# Altium PCB PCB1.PcbDoc
Units mil, origin at the board's own origin, x right, y up, seen from the top; angles counter-clockwise.
Board outline 4532.36 x 3130 mil, 2 copper layers (L1, L2), stack 62.756 mil thick; 46 components, 43 nets, 198 pads, 160 vias.
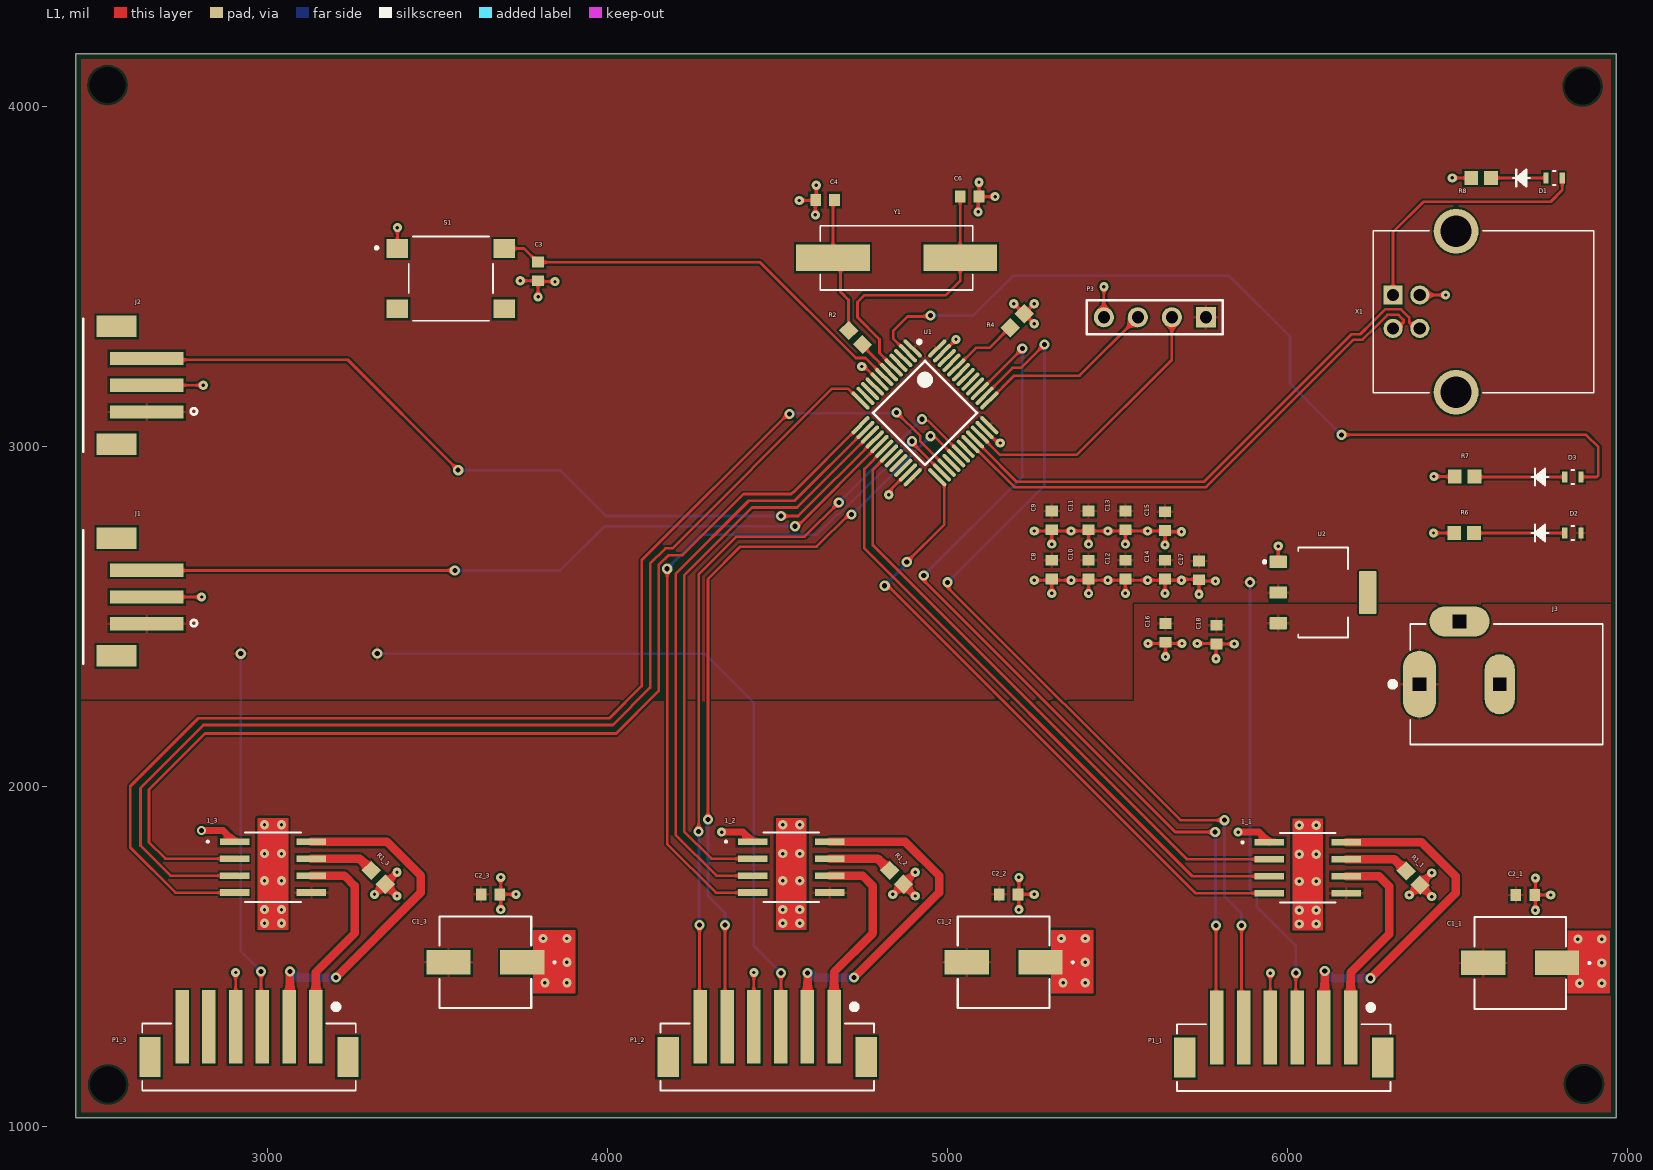
[diagram p0: L1 view]
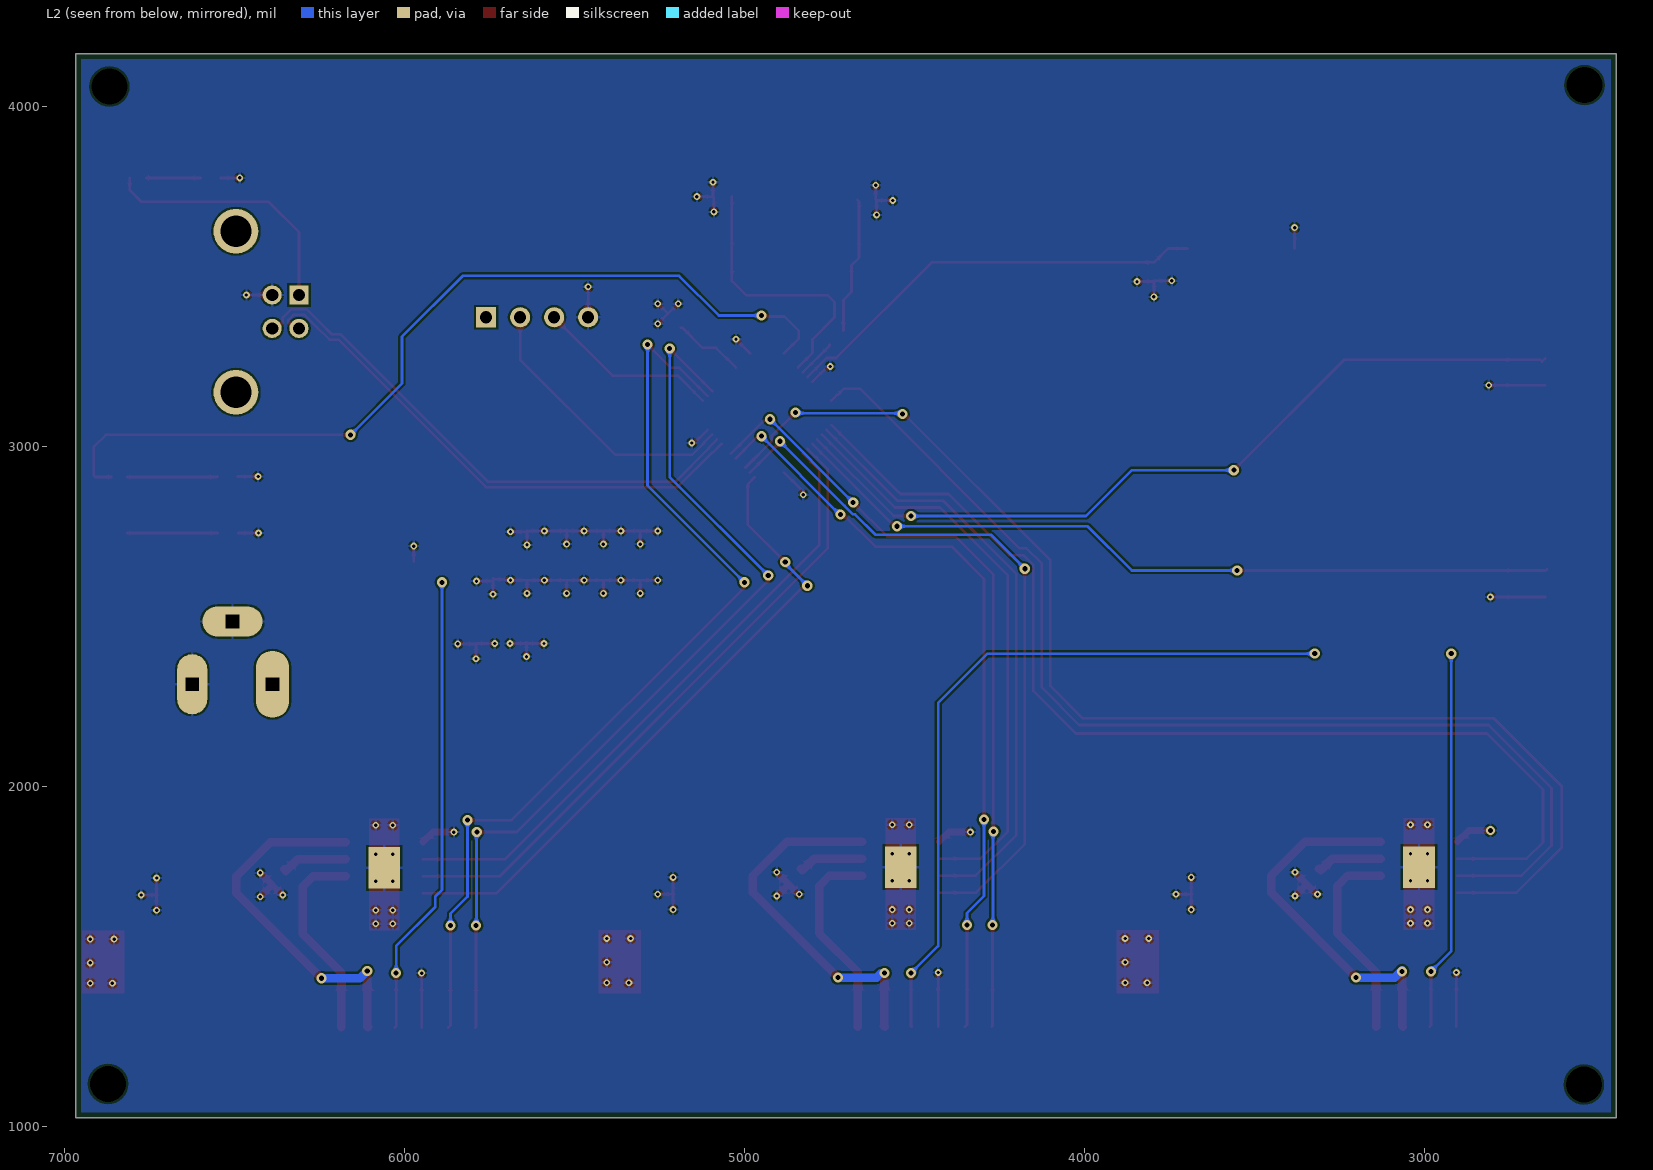
[diagram p1: L2 view, seen from below]

## Layer stack, top to bottom
Top Solder: solder mask 0.1, Solder Resist, Dk 1
L1: signal copper 1.3779
Core: dielectric 60, FR-4, Dk 4.6
L2: signal copper 1.3779
Bottom Solder: solder mask 0.1, Solder Resist, Dk 1

## Board outline
2435,1025 2435,4155 6967.36,4155 6967.36,1025

## Design rules (kind name [scope] priority, off if disabled: settings)
BoardOutlineClearance [All] p1: gap=15 ignorepadtopadclearanceinfootprint=FALSE
Clearance [All] p1: gap=6 ignorepadtopadclearanceinfootprint=FALSE except(0: Arc-Hole Track-Hole SMDPad-Hole THPad-Hole Via-Hole Fill-Hole Poly-Hole Region-Hole Text-Hole)
ComponentClearance [All] p1: gap=1 collisioncheckmode=3 verticalgap=1 showdistances=FALSE
DiffPairsRouting [All] p1: maxlimit=393.7 minlimit=6 mostfreqgap=8 toplayer_minwidth=6 toplayer_maxwidth=15 toplayer_prefwidth=8 bottomlayer_minwidth=6 bottomlayer_maxwidth=15 bottomlayer_prefwidth=8 maxuncoupledlength=500
HoleSize [All] p1: absolutevalues=TRUE maxlimit=265 minlimit=10 maxpercent=80.000 minpercent=20.000
HoleToHoleClearance [All] p1: gap=10 allowstackedmicrovias=FALSE
MinimumAnnularRing [All] p1: minimumring=5
MinimumSolderMaskSliver [All] p1: minsoldermaskwidth=0
PlaneClearance [All] p1: clearance=10
PlaneConnect [All] p1: planeconnectstyle=Direct reliefexpansion=16 reliefentries=4 reliefconductorwidth=6 reliefairgap=6
PolygonConnect [All] p1: connectstyle=Relief reliefconductorwidth=8 reliefentries=4 polygonreliefangle="90 Angle" airgapwidth=6
RoutingCorners [All] p1: cornerstyle=45-Degree minsetback=49.21 maxsetback=49.21
RoutingVias [All] p1: holewidth=15 width=30 viastyle="Through Hole" minholewidth=10 minwidth=27 maxholewidth=100 maxwidth=114
SilkToSilkClearance [All] p1: silktosilkclearance=0
SilkToSolderMaskClearance [IsPad] p1: minsilkscreentomaskgap=6 clearancetoexposedcopper=TRUE
SolderMaskExpansion [All] p1: expansion=2.95
SupplyNets [All] p1: voltage=3,000
Width [All] p1: maxlimit=400 minlimit=6 preferedwidth=8
20 further rules are at their usual default settings.

## Classes and differential pairs
channel class H-Bridge: MotorX MotorY MotorZ
component class MotorZ: 1_3 C1_3 C2_3 P1_3 R1_3 "R1_Motor - Z"
component class MotorY: 1_2 C1_2 C2_2 P1_2 R1_2 "R1_Motor - Y"
component class PCB_TopSchematic: C3 C4 C6 C8 C9 C10 C11 C12 C13 C14 C15 C16 C17 C18 D1 D2 D3 J1 J2 J3 P3 R2 R4 R6 R7 R8 S1 U1 U2 X1 Y1
component class MotorX: 1_1 C1_1 C2_1 P1_1 R1_1

## Components (designator, comment, footprint, x,y, rotation, side; value= is the part's Value field where it differs from the comment)
1_1 "DRV8872DDAR" DDA0008H_N 6060,1760 r0 top (schematic designator 1)
1_2 "DRV8872DDAR" DDA0008H_N 4540,1761.81 r0 top (schematic designator 1)
1_3 "DRV8872DDAR" DDA0008H_N 3015,1761.81 r0 top (schematic designator 1)
C1_1 "47uF" CAP_UWF_6P3X5P00 6685,1480 r180 top (schematic designator C1)
C1_2 "47uF" CAP_UWF_6P3X5P00 5165,1481.81 r180 top (schematic designator C1)
C1_3 "47uF" CAP_UWF_6P3X5P00 3640,1481.81 r180 top (schematic designator C1)
C2_1 "Cap Semi" 1608[0603] 6700,1680 r180 top value=0.1uF (schematic designator C2)
C2_2 "Cap Semi" 1608[0603] 5180,1681.81 r180 top value=0.1uF (schematic designator C2)
C2_3 "Cap Semi" 1608[0603] 3655,1681.81 r180 top value=0.1uF (schematic designator C2)
C3 "Cap Semi" 1608[0603] 3795,3515 r90 top value=100nF (schematic designator C4)
C4 "Cap Semi" 1608[0603] 4640,3725 r180 top value=20pF (schematic designator C12)
C6 "Cap Semi" 1608[0603] 5065,3735 r0 top value=20pF (schematic designator C3)
C8 "Cap Semi" 1608[0603] 5306.67,2637.44 r90 top value=100nF
C9 "Cap Semi" 1608[0603] 5306.67,2782.44 r90 top value=100nF (schematic designator C5)
C10 "Cap Semi" 1608[0603] 5415,2637.44 r90 top value=10uF (schematic designator C9)
C11 "Cap Semi" 1608[0603] 5415,2782.44 r90 top value=100nF (schematic designator C6)
C12 "Cap Semi" 1608[0603] 5523.33,2637.44 r90 top value=100nF (schematic designator C10)
C13 "Cap Semi" 1608[0603] 5523.33,2782.44 r90 top value=100nF (schematic designator C7)
C14 "Cap Semi" 1608[0603] 5640,2637.44 r90 top value=1uF (schematic designator C11)
C15 "Cap Semi" 1608[0603] 5640,2780 r90 top value=22uF (schematic designator C16)
C16 "Cap Semi" 1608[0603] 5641.42,2451.34 r90 top value=47uF (schematic designator C13)
C17 "Cap Semi" 1608[0603] 5740,2635 r90 top value=47uF (schematic designator C15)
C18 "Cap Semi" 1608[0603] 5791.42,2446.34 r90 top value=10uF (schematic designator C14)
D1 "SML-E12M8WT86" LED_SMLD12_ROM 6785,3790 r0 top (schematic designator D2)
D2 "SML-E12M8WT86" LED_SMLD12_ROM 6840,2745 r0 top (schematic designator D1)
D3 "SML-E12M8WT86" LED_SMLD12_ROM 6840,2910 r0 top
J1 "B3B-PH-SM4-TB(LF)(SN)" JST_B3B-PH-SM4-TB(LF)(SN) 2555,2556.77 r90 top (schematic designator J4)
J2 "B3B-PH-SM4-TB(LF)(SN)" JST_B3B-PH-SM4-TB(LF)(SN) 2555,3180 r90 top locked (schematic designator J3)
J3 "PJ-002A" CUI_PJ-002A 6388.78,2300 r0 top (schematic designator J1)
P1_1 "B6B-PH-SM4-TB(LF)(SN)" JST_B6B-PH-SM4-TB(LF)(SN) 5989.37,1290 r180 top (schematic designator P1)
P1_2 "B6B-PH-SM4-TB(LF)(SN)" JST_B6B-PH-SM4-TB(LF)(SN) 4469.37,1291.81 r180 top (schematic designator P1)
P1_3 "B6B-PH-SM4-TB(LF)(SN)" JST_B6B-PH-SM4-TB(LF)(SN) 2944.37,1291.81 r180 top (schematic designator P1)
P3 "Header 4" HDR1X4 5760,3380 r180 top (schematic designator P1)
R1_1 "0.2" RESC1607X60N 6370,1730 r315 top (schematic designator R1)
R1_2 "0.2" RESC1607X60N 4850,1731.81 r315 top (schematic designator R1)
R1_3 "0.2" RESC1607X60N 3325,1731.81 r315 top (schematic designator R1)
R2 "Res3" RESC1607X60N 4729.54,3320.46 r315 top value=360
R4 "Res3" RESC1607X60N 5205,3370 r45 top value=10K (schematic designator R6)
R6 "Res3" RESC1607X60N 6520,2745 r0 top value=1K (schematic designator R3)
R7 "Res3" RESC1607X60N 6521.42,2911.34 r0 top value=1K (schematic designator R5)
R8 "Res3" RESC1607X60N 6570,3790 r0 top value=1K (schematic designator R4)
S1 "SW-PB" SW_B3FS-1010P 3538.58,3493.66 r0 top
U1 "STM32F103C8T6" STM-LQFP48_N 4933.58,3098.66 r315 top
U2 "AMS1117-3.3" SOT229P700X180-4N 6105,2570 r270 top
X1 "USB-B1HSB6" OST_USB-B1HSB6 6496.42,3396.34 r90 top
Y1 "8MHz" XTAL_ECS-80-20-5PX-TR 4850,3555 r180 top

## Footprints (in the part's own frame and the unit in brackets; to place one, negate y for a bottom-side part, rotate by r counter-clockwise, add the part's x,y. Pads: shape width x height; smd on the part's side, far side on the other; paste and mask are expansions set on the pad)
1608[0603] [mm] "Chip Capacitor, Body 1.6x0.8mm, IPC High Density"
  rect 0.8x0.9 smd: 1(-0.7,0) 2(0.7,0)
  body extent -0.87,-0.48 0.87,0.48, height 1.3
CAP_UWF_6P3X5P00 [mil]
  rect 130x72 smd paste+0 mask+0: 1(-108.5,0) 2(108.5,0)
  silkscreen extent -206,-135 135,135, body extent 0,0 10,10, height 10
CUI_PJ-002A [mm]
  oval 2.5x5 hole 1 square: 1(0,0)
  oval 2.25x4.5 hole 1 square: 2(6,0)
  oval 4.5x2.25 hole 1 square: 3(3,4.7)
  silkscreen extent -2.2,-4.5 13.7,4.5
DDA0008H_N [mil]
  rect 87x20 smd: 1(-113.19,75) 2(-113.19,25) 3(-113.19,-25) 4(-113.19,-75) 5(113.19,-75) 6(113.19,-25) 7(113.19,25) 8(113.19,75)
  rect 94x122 smd far side paste-118.11: 9(0,0)
  silkscreen extent -195,-102 82,102
HDR1X4 [mm] "Connector; Header; 4 Position"
  rect 1.5x1.5 hole 0.9: 1(0,0)
  round 1.5 hole 0.9: 2(2.54,0) 3(5.08,0) 4(7.62,0)
  silkscreen extent -1.27,-1.27 8.89,1.27
JST_B3B-PH-SM4-TB(LF)(SN) [mm]
  rect 1x5.5 smd: 1(-2,-2.25) 2(0,-2.25) 3(2,-2.25)
  rect 1.6x3 smd: 4(4.4,0) 5(-4.4,0)
  silkscreen extent -4.97,-6.01 4.97,2.5
JST_B6B-PH-SM4-TB(LF)(SN) [mm]
  rect 1x5.5 smd: 1(-5,0) 2(-3,0) 3(-1,0) 4(1,0) 5(3,0) 6(5,0)
  rect 1.6x3 smd: P1(-7.4,2.25) P2(7.4,2.25)
  silkscreen extent -7.98,-1.7 7.98,4.75
LED_SMLD12_ROM [mil]
  rect 15.5x32 smd: 1(-23.75,0) 2(23.75,0)
  silkscreen extent -122,-25 4,25, body extent 0,0 10,10, height 10
OST_USB-B1HSB6 [mm]
  rect 1.428x1.428 hole 0.92: 1(1.25,4.71)
  round 1.428 hole 0.92: 2(-1.25,4.71) 3(-1.25,2.71) 4(1.25,2.71)
  round 3.346 hole 2.33: P1(-6.02,0) P2(6.02,0)
  silkscreen extent -6.05,-10.3 6.05,6.2
RESC1607X60N [mm]
  rect 1.04x1.02 smd: 1(-0.735,0) 2(0.735,0)
SOT229P700X180-4N [mm]
  rrect15% 0.93x1.31 smd: 1(-2.29,-3.345) 2(0,-3.345) 3(2.29,-3.345)
  rrect15% 3.24x1.31 smd: 4(0,3.345)
  silkscreen extent -3.36,-4.47 3.36,1.86
STM-LQFP48_N [mm] "QFP, 48-Leads, Body 7x7mm, Pitch 0.5mm, IPC Medium Density"
  oval 1.8x0.3 smd: 1(-4.05,2.75) 2(-4.05,2.25) 3(-4.05,1.75) 4(-4.05,1.25) 5(-4.05,0.75) 6(-4.05,0.25) 7(-4.05,-0.25) 8(-4.05,-0.75) 9(-4.05,-1.25) 10(-4.05,-1.75) 11(-4.05,-2.25) 12(-4.05,-2.75) 25(4.05,-2.75) 26(4.05,-2.25) 27(4.05,-1.75) 28(4.05,-1.25) 29(4.05,-0.75) 30(4.05,-0.25) 31(4.05,0.25) 32(4.05,0.75) 33(4.05,1.25) 34(4.05,1.75) 35(4.05,2.25) 36(4.05,2.75)
  oval 0.3x1.8 smd: 13(-2.75,-4.05) 14(-2.25,-4.05) 15(-1.75,-4.05) 16(-1.25,-4.05) 17(-0.75,-4.05) 18(-0.25,-4.05) 19(0.25,-4.05) 20(0.75,-4.05) 21(1.25,-4.05) 22(1.75,-4.05) 23(2.25,-4.05) 24(2.75,-4.05) 37(2.75,4.05) 38(2.25,4.05) 39(1.75,4.05) 40(1.25,4.05) 41(0.75,4.05) 42(0.25,4.05) 43(-0.25,4.05) 44(-0.75,4.05) 45(-1.25,4.05) 46(-1.75,4.05) 47(-2.25,4.05) 48(-2.75,4.05)
  silkscreen extent -4.17,-2.75 2.75,3.57, body extent -3.5,-3.5 3.5,3.5, height 1.6
SW_B3FS-1010P [mm]
  rect 1.6x1.4 smd: 1(-4,2.25) 2(4,2.25) 3(-4,-2.25) 4(4,-2.25)
  silkscreen extent -5.65,-3.15 3.15,3.15
XTAL_ECS-80-20-5PX-TR [mm]
  rect 5.5x2 smd: 1(-4.75,0) 2(4.75,0)
  silkscreen extent -5.7,-2.4 5.7,2.4

## Part data
1_1 1_2 1_3: "Unipolar Motor Driver NMOS PWM 8-SO PowerPad", Package="SO-8 Texas Instruments", Availability=Unavailable, MF="Texas Instruments", MP=DRV8872DDAR, Price=None, SnapEDA_Link=https://www.snapeda.com/parts/DRV8872DDAR/Texas%20Instruments/view-part/561864/?ref=snap
C1_1 C1_2 C1_3: library part UWR1E470MCL1GB, "No Description Available", Built_By=EMA_Cory, Copyright="Copyright (C) 2018 Accelerated Designs. All rights reserved", Manufacturer_Part_Number=UWR1E470MCL1GB, RefDes=RefDes, SourceLibrary=Nichicon_2019-09-13, Type=DEV, Vendor=Nichicon
C2_1 C2_2 C2_3 C3 C4 C6 C8 C9 C10 C11 C12 C13 C14 C15 C16 C17 C18: "Capacitor (Semiconductor SIM Model)", LatestRevisionDate=29-May-2009, LatestRevisionNote="IPC-7351 Footprint Added.", PackageDescription="Chip Capacitor", PackageReference=C1206, Published=8-Jun-2000, Publisher="Altium Limited"
D1 D2 D3: "No Description Available", Built_By=EMA_Matt, Copyright="Copyright (C) 2018 Accelerated Designs. All rights reserved", Manufacturer_Part_Number=SML-E12M8WT86, RefDes=RefDes, SourceLibrary=Rohm_2019-09-23, Type=DEV, Vendor="ROHM Semiconductor"
J1 J2: "Connector Header Surface Mount 3 position 0.079 _2.00mm_", Package="2010 JST", Digi-Key_Part_Number=455-1735-1-ND, Digi-Key_Purchase_URL=https://www.digikey.com/product-detail/en/jst-sales-america-inc/B3B-PH-SM4-TB_LF__SN_/455-1735-1-ND/926832?utm_source=snapeda&utm_medium=aggregator&utm_campaign=symbol, MF="JST Sales", MP=B3B-PH-SM4-TB_LF__SN_, SnapEDA_Link=https://www.snapeda.com/parts/B3B-PH-SM4-TB%28LF%29%28SN%29/JST%20Sales%20America%20Inc./view-part/53135/?ref=snap
J3: "2,0 x 6,5 mm, 2,5 A, Yatay, Açık Delik, Dc Güç Jakı Konnektörü", Package=None, Availability=Unavailable, CUI_purchase_URL=https://www.cuidevices.com/product/interconnect/connectors/dc-power-connectors/jacks/pj-002a?utm_source=snapeda.com&utm_medium=referral&utm_campaign=snapedaBOM, MF="CUI Devices", MP=PJ-002A, Price=None, SnapEDA_Link=https://www.snapeda.com/parts/PJ-002A/CUI%20Devices/view-part/287588/?ref=snap
P1_1 P1_2 P1_3: "Connector Header Surface Mount 6 position 0.079 _2.00mm_", Package=None, Availability=Unavailable, MF="JST Sales", MP=B6B-PH-SM4-TB_LF__SN_, Price=None, SnapEDA_Link=https://www.snapeda.com/parts/B6B-PH-SM4-TB%28LF%29%28SN%29/JST%20Sales%20America%20Inc./view-part/52131/?ref=snap
P3: "Header, 4-Pin", LatestRevisionDate=17-Jul-2002, LatestRevisionNote="Re-released for DXP Platform.", Publisher="Altium Limited"
R1_1 R1_2 R1_3: library part RC0603JR-071KL, "1 kOhms ±5% 0.1W, 1/10W Chip Resistor 0603 _1608 Metric_ Moisture Resistant Thick Film", Package="0603 Yageo", Digi-Key_Part_Number=311-1.0KGRCT-ND, Digi-Key_Purchase_URL=https://www.digikey.co.nz/product-detail/en/yageo/RC0603JR-071KL/311-1.0KGRCT-ND/729624?utm_source=snapeda&utm_medium=aggregator&utm_campaign=symbol, MF=Yageo, MP=RC0603JR-071KL, SnapEDA_Link=https://www.snapeda.com/parts/RC0603JR-071KL/Yageo/view-part/106141/?ref=snap
R2 R4 R6 R7 R8: "Resistor", LatestRevisionDate=29-May-2009, LatestRevisionNote="IPC-7351 Footprint Added.", PackageDescription="Chip Resistor", PackageReference=J1-0603, Published=8-Jun-2000, Publisher="Altium Limited"
S1: "Switch", LatestRevisionDate=17-Jul-2002, LatestRevisionNote="Re-released for DXP Platform.", PackageDescription="Switch; 2 Leads", PackageReference=SPST-2, Published=24-Mar-1999, Publisher="Altium Limited"
U1: "ARM Cortex-M3 32-bit MCU, 64 KB Flash, 20 KB Internal RAM, 37 I/Os, 48-pin LQFP, -40 to 85 degC, Tray", I/Os (High Current)=37, Operating Frequency(F) (Processor speed) (MHz)=72, Supplier Part Number 1=497-6063-ND, Supply Voltage(Vcc) min (V)=2, A/D Converter="2x12-bit (10 Channel)", ComponentLink1Description="Manufacturer URL", ComponentLink1URL=http://www.st.com/web/en/home.html, ComponentLink2Description=Datasheet, ComponentLink2URL=http://www.st.com/st-web-ui/static/active/en/resource/technical/document/datasheet/CD00161566.pdf, ComponentLink3Description="Package Specification", ComponentLink3URL=http://www.st.com/st-web-ui/static/active/en/resource/technical/document/datasheet/DM00058181.pdf, Core="ARM Cortex-M3", DatasheetVersion="Rev. 16", FLASH Size (Prog) (kB)=64, Internal RAM Size (kB)=20, Mounting Technology="Surface Mount", PackageDescription="48-Pin Low Profile Quad Flat Package, 7 x 7 mm Body, 0.5 mm Pitch", PackageReference=LQFP48, PackageVersion="Rev. 6, 06/2013", Packing=Tray, PartNumber=STM32F103C8T6, Supplier 1=Digi-Key, Supplier 2=Farnell, Supplier 3=Newark, Supplier 4=Newark, Supplier 5=Mouser, Supplier Part Number 2=1447637, Supplier Part Number 3=59M2182, Supplier Part Number 4=57P1222, Supplier Part Number 5=511-STM32F103C8T6
U2: "Sot223/Pkg 1-Amp 3.3-Volt Low Drop Out Voltage Regulatator", Package=None, Availability=Unavailable, MF="Advanced Monolithic Systems", MP=AMS1117-3.3, Price=None, SnapEDA_Link=https://www.snapeda.com/parts/AMS1117-3.3/Advanced%20Monolithic%20Systems/view-part/53450/?ref=snap
X1: "USB-B _USB TYPE-B_ Receptacle Connector 4 Position Through Hole, Right Angle", Package=None, Digi-Key_Part_Number=ED2983-ND, Digi-Key_Purchase_URL=https://www.digikey.com/product-detail/en/on-shore-technology-inc/USB-B1HSB6/ED2983-ND/2677744?utm_source=snapeda&utm_medium=aggregator&utm_campaign=symbol, MF="On Shore", MP=USB-B1HSB6, SnapEDA_Link=https://www.snapeda.com/parts/USB-B1HSB6/On%20Shore%20Technology%20Inc./view-part/227661/?ref=snap
Y1: library part ECS-80-20-5PX-TR, "8MHz ±30ppm Crystal 20pF 60 Ohms HC-49/US", Package="HC-49/US ECS International", Digi-Key_Part_Number=XC2076CT-ND, Digi-Key_Purchase_URL=https://www.digikey.in/product-detail/en/ecs-inc/ECS-80-20-5PX-TR/XC2076CT-ND/5875560?utm_source=snapeda&utm_medium=aggregator&utm_campaign=symbol, MF="ECS Inc.", MP=ECS-80-20-5PX-TR, SnapEDA_Link=https://www.snapeda.com/parts/ECS-80-20-5PX-TR/ECS%20Inc./view-part/2460571/?ref=snap

## Free pads (board coordinates)
  round 70 hole 106: 1(2528,4063) 2(6869,4059) 3(6873,1124) 4(2530,1122)

## Via types
v1: diameter 27/20 (per signal layer), hole 10, L1 to L2, 119 vias
v2: diameter 30, hole 15, L1 to L2, 40 vias
v3: diameter 27, hole 15, L1 to L2, 1 vias

## Nets (pads, with @x,y where several pads share a name; then routed paths per layer and width w, separated by ;. In a path a pad name is that pad's centre, name@x,y a point inside that pad or via, vN(x,y) a via of type N, cw(c..) or ccw(c..) an arc to the next point about the centre after c; other vN are vias at no path point)
+3V3: C8.2 C9.2 C10.2 C11.2 C12.2 C13.2 C14.2 C15.2 C17.2 D2.2 J1.1 J2.1 P1_1.3 P1_2.3 P1_3.3 P3.1 U1.1 U1.9 U1.24 U1.36 U1.48 U2.2 | length 4647.3
  L1 w8: v2(2980,1455) 2980,1295.55 P1_3.3 ; P1_2.3 4510,1293.07 v2(4510,1450) ; v2(6025,1450) 6025,1293.74 P1_1.3
  L2 w8: v2(2920,2390) 2920,1515 v2(2980,1455) ; v2(3321.81,2390.22) 4284.78,2390.22 4430,2245 4430,1530 v2(4510,1450) ; v2(5890,2600) 5890,1695 5910,1675 5910,1645 6025,1530 v2(6025,1450)
ENCODER_XA: P1_1.5 U1.38 | length 2803.8
  L1 w8: v2(5000,2600) 5000,2585 5685,1900 v2(5815,1900) ; U1.38 5191.34,3231.14 5216.14,3231.14 v2(5285,3300) ; v2(5865,1590) 5865,1296.26 P1_1.5
  L2 w8: v2(5000,2600) 5285,2885 v2(5285,3300) ; v2(5815,1900) 5815,1675 5865,1625 v2(5865,1590)
ENCODER_XB: P1_1.6 U1.39 | length 2720.6
  L1 w8: v2(4930,2620) 4930,2605 5670,1865 v2(5787.5,1865) ; U1.39 v2(5220,3287.64) ; v2(5790,1590) 5790,1292.52 P1_1.6
  L2 w8: v2(4930,2620) 5220,2910 v2(5220,3287.64) ; v2(5787.5,1865) 5788.75,1863.75 5788.75,1591.25 v2(5790,1590)
ENCODER_YA: P1_2.5 U1.29 | length 2272.8
  L1 w8: v2(4295,1901.81) 4295,2610 4390,2705 4615,2705 4710,2800 v2(4717.5,2800) ; v2(4345,1591.81) 4345,1298.07 P1_2.5 ; v2(4950,3030) 4954.21,3025.79 4964.7,3025.79 U1.29
  L2 w8: v2(4295,1901.81) 4295,1676.81 4345,1626.81 v2(4345,1591.81) ; v2(4717.5,2800) 4720,2800 v2(4950,3030)
ENCODER_YB: P1_2.6 U1.30 | length 2338.7
  L1 w8: v2@4265,1866.81 v2(4267.5,1866.81) 4267.5,2622.5 4379.38,2734.38 4579.38,2734.38 v2(4680,2835) ; v2(4270,1591.81) 4270,1294.33 P1_2.6 ; v2(4925,3080) 4929.21,3075.79 4942.53,3075.79 U1.30
  L2 w8: v2(4267.5,1866.81) 4268.75,1865.56 4268.75,1593.06 v2(4270,1591.81) ; v2(4680,2835) 4680,2835.36 4924.64,3080 v2(4925,3080)
FIM_CURSO_X: J2.3 U1.16 | length 2432.7
  L1 w8: J2.3 2652.95,3249.37 2658.58,3255 3235,3255 v2(3560,2930) ; v2(4510,2795) 4560.32,2795 U1.16
  L2 w8: v2(3560,2930) 3860,2930 3995,2795 v2(4510,2795)
FIM_CURSO_Y: J1.3 U1.17 | length 2316.9
  L1 w8: J1.3@2638.58,2638.74 2642.32,2635 v2(3550,2635) ; v2(4551.12,2765) 4558.16,2765 U1.17
  L2 w8: v2(3550,2635) 3860,2635 3990,2765 v2(4551.12,2765)
GND: 1_1.1 1_1.9 1_2.1 1_2.9 1_3.1 1_3.9 C1_1.1 C1_2.1 C1_3.1 C2_1.1 C2_2.1 C2_3.1 C3.1 C4.2 C6.2 C8.1 C9.1 C10.1 C11.1 C12.1 C13.1 C14.1 C15.1 C16.1 C17.1 C18.1 J1.2 J2.2 J3.2 J3.3 P1_1.4 P1_2.4 P1_3.4 P3.4 R1_1.2 R1_2.2 R1_3.2 R4.2 R6.1 R7.1 R8.1 S1.1 U1.8 U1.23 U1.35 U1.47 U2.1 X1.4 | length 4868.2
  L1 w8: J1.2 v1(2805,2556.77) ; J2.2 v1(2810,3180) ; P1_3.4 v1(2905,1451.81) ; S1.1 v1(3381.1,3643.9) ; v1(3685,1636.81) 3685,1679.37 C2_3.1 ; v1(3685,1731.81) 3685,1684.25 C2_3.1 ; v1(3730,1681.81) C2_3.1 ; v1@3740,3490 v1(3742.56,3487.44) C3.1 ; v1(3795,3440) C3.1 ; v1(3845,3485) 3797.44,3485 C3.1 ; P1_2.4 v1(4430,1451.81) ; v1(4563.72,3723.72) 4611.16,3723.72 v1(4611.16,3681.28) ; C4.2@4613.72,3726.28 v1(4613.72,3768.72) ; v1(4747.74,3235) 4755.49,3235 U1.8 ; v1(4826.83,2857.51) 4826.83,2866.63 U1.23 ; U1.47 4984.05,3274.05 v1(5025,3315) ; v1(5090,3690) 5090,3732.44 C6.2 ; v1(5092.56,3777.44) C6.2 ; U1.35 5147.52,3010 v1(5155,3010) ; v1(5140,3735) C6.2 ; v1(5195,3420) 5224.54,3390.46 R4.2 ; v1(5210,1636.81) 5210,1679.37 C2_2.1 ; v1(5210,1731.81) 5210,1684.25 C2_2.1 ; v1(5255,1681.81) C2_2.1 ; v1(5255,3360.92) R4.2 ; v1(5255,3420) R4.2 ; v1(5255.25,2606.1) C8.1@5302.89,2606.1 ; v1(5255.25,2751.1) C9.1@5302.89,2751.1 ; v1(5306.67,2567.52) 5306.67,2606.1 v1(5363.58,2606.1) C10.1@5415,2606.1 ; v1(5306.67,2712.52) 5306.67,2751.1 v1(5363.58,2751.1) C11.1@5411.22,2751.1 ; v1(5415,2567.52) C10.1@5415,2606.1 ; v1(5415,2712.52) 5415,2751.1 v1(5471.92,2751.1) C13.1@5519.55,2751.1 ; P3.4 v1(5460,3470) ; C12.1@5519.55,2606.1 v1(5471.92,2606.1) C10.1@5415,2606.1 ; v1(5523.33,2567.52) 5523.33,2606.1 v1(5588.58,2606.1) C14.1@5636.22,2606.1 ; v1(5523.33,2712.52) C13.1@5523.33,2751.1 ; C13.1 5527.11,2751.1 v1(5588.58,2751.1) 5633.78,2751.1 C15.1@5636.22,2748.66 ; v1@5595,2425 v1(5590,2420) 5637.64,2420 C16.1 ; v1@5640,2380 v1(5641.42,2381.42) C16.1 ; v1(5640,2567.52) 5640,2606.1 v1(5688.58,2606.1) ; v1(5640,2710.08) C15.1 ; C15.1@5643.78,2748.66 v1(5688.58,2748.66) ; v1@5688.58,2608.66 5736.22,2608.66 C17.1@5740,2612.44 ; v1(5690,2420) 5645.2,2420 C16.1 ; v1(5735,2420) 5790.2,2420 C18.1 ; v1(5740,2565.08) C17.1@5740,2603.66 ; C17.1@5743.78,2603.66 v1(5788.58,2603.66) ; v1(5790,2375) 5790,2417.36 C18.1 ; v1(5843.78,2418.78) C18.1 ; P1_1.4 v1(5950,1450) ; v1@5970,2710 v1(5973.31,2706.69) U2.1 ; X1.4 v1(6465.55,3445.55) ; v1(6430,2745) R6.1@6490.47,2745 ; v1(6431.34,2911.34) R7.1@6491.89,2911.34 ; v1(6485,3790) R8.1 ; v1(6730,1635) 6730,1677.56 C2_1.1 ; v1(6730,1730) 6730,1682.44 C2_1.1 ; v1(6775,1680) C2_1.1
  L1 w20: v3(2805,1870) 2868.62,1870 1_3.1 ; v1(3313.75,1681.81) 3315,1681.81 3344.54,1711.35 R1_3.2 ; v1(3380,1676.81) R1_3.2 ; v1(3380,1746.81) 3345.46,1712.27 R1_3.2 ; v1(4335,1865) 4398.62,1865 1_2.1 ; v1(4838.75,1681.81) 4840,1681.81 4869.54,1711.35 R1_2.2 ; v1(4905,1676.81) R1_2.2 ; v1(4905,1746.81) 4870.46,1712.27 R1_2.2 ; v1(5855,1865) 5916.81,1865 1_1.1 ; v1(6358.75,1680) 6360,1680 6389.54,1709.54 R1_1.2 ; v1(6425,1675) R1_1.2 ; v1(6425,1745) 6390.46,1710.46 R1_1.2
  other v1: 6860,1420 6925,1420 3815,1421.81 3880,1421.81 5340,1421.81 5405,1421.81 6925,1480 3880,1481.81 5405,1481.81 6855,1550 6925,1550 3810,1551.81 3880,1551.81 5335,1551.81 5405,1551.81 6035,1595 6085,1595 2990,1596.81 3040,1596.81 4515,1596.81 4565,1596.81 6035,1635 6085,1635 2990,1636.81 3040,1636.81 4515,1636.81 4565,1636.81 6035,1720 6085,1720 2990,1721.81 3040,1721.81 4515,1721.81 4565,1721.81 6035,1800 6085,1800 2990,1801.81 3040,1801.81 4515,1801.81 4565,1801.81 6035,1885 6085,1885 2990,1886.81 3040,1886.81 4515,1886.81 4565,1886.81
H_BRIDGE_XA: 1_1.3 U1.18 | length 1908.8
  L1 w8: U1.18 4755,2934 4755,2700 5720,1735 1_1.3
H_BRIDGE_XB: 1_1.2 U1.19 | length 1838.7
  L1 w8: U1.19 4780,2931.16 4780,2710 5705,1785 1_1.2
H_BRIDGE_YA: 1_2.3 U1.14 | length 1778.3
  L1 w8: 1_2.3 4320,1736.81 4200,1856.81 4200,2625 4415,2840 4549.65,2840 U1.14
H_BRIDGE_YB: 1_2.2 U1.15 | length 1707
  L1 w8: 1_2.2 4305,1786.81 4225,1866.81 4225,2620 4425,2820 4557.49,2820 U1.15
H_BRIDGE_ZA: 1_3.3 U1.12 | length 3317.7
  L1 w8: 1_3.3 2713.19,1736.81 2625,1825 2625,1995 2810,2180 4015,2180 4125,2290 4125,2655 4170,2700 4190,2700 4660,3170 4706.64,3170 4724.98,3151.66 4727.47,3151.66 U1.12
H_BRIDGE_ZB: 1_3.2 U1.13 | length 3182.2
  L1 w8: 1_3.2 2698.19,1786.81 2650,1835 2650,1990 2815,2155 4025,2155 4150,2280 4150,2650.36 4179.64,2680 4220,2680 4400,2860 4540,2860 4545,2865 4546.81,2865 U1.13
LED_OUT: D3.2 U1.2 | length 2652.2
  L1 w8: U1.2 4840,3317.52 4840,3340 4882.5,3382.5 4947.5,3382.5 v2(4950.25,3385.25) ; v2(6159,3034) 6879,3034 6915,2998 6915,2914.69 6910.31,2910 D3.2
  L2 w8: v2(4950.25,3385.25) 5075.25,3385.25 5192,3502 5829,3502 6008,3323 6008,3185 v2(6159,3034)
Net1_1_6: 1_1.6 P1_1.1 | length 601.4
  L1 w25: 1_1.6 6270,1735 6300,1705 6300,1565 6186.22,1451.22 P1_1.1
Net1_1_7: 1_1.7 R1_1.1 | length 200.7
  L1 w25: 1_1.7 6315,1785 R1_1.1@6344.54,1755.46 ; R1_1.1 R1_1.1@6344.54,1755.46 ; R1_1.1@6354.54,1755.46 R1_1.1@6344.54,1755.46
Net1_1_8: 1_1.8 P1_1.2 | length 1078.1
  L1 w25: P1_1.2 6110,1292.52 v2(6110,1456.41) ; 1_1.8 6395,1835 6495,1735 6495,1685 v2(6245,1435)
  L2 w25: v2(6110,1456.41) 6131.41,1435 v2(6245,1435)
Net1_2_6: 1_2.6 P1_2.1 | length 601.4
  L1 w25: 1_2.6 4750,1736.81 4780,1706.81 4780,1566.81 4666.22,1453.03 P1_2.1
Net1_2_7: 1_2.7 R1_2.1 | length 200.7
  L1 w25: 1_2.7 4795,1786.81 R1_2.1@4824.54,1757.27 ; R1_2.1 R1_2.1@4824.54,1757.27 ; R1_2.1@4834.54,1757.27 R1_2.1@4824.54,1757.27
Net1_2_8: 1_2.8 P1_2.2 | length 1069.3
  L1 w25: P1_2.2 4590,1294.33 4588,1296.33 v2(4588,1450) ; 1_2.8 4875,1836.81 4975,1736.81 4975,1686.81 v2(4725,1436.81)
  L2 w25: v2(4588,1450) 4598.22,1450 4611.41,1436.81 v2(4725,1436.81)
Net1_3_6: 1_3.6 P1_3.1 | length 601.4
  L1 w25: 1_3.6 3225,1736.81 3255,1706.81 3255,1566.81 3141.22,1453.03 P1_3.1
Net1_3_7: 1_3.7 R1_3.1 | length 200.7
  L1 w25: 1_3.7 3270,1786.81 R1_3.1@3299.54,1757.27 ; R1_3.1 R1_3.1@3299.54,1757.27 ; R1_3.1@3309.54,1757.27 R1_3.1@3299.54,1757.27
Net1_3_8: 1_3.8 P1_3.2 | length 1078.1
  L1 w25: P1_3.2 3065,1294.33 v2@3065,1458.22 ; 1_3.8 3350,1836.81 3450,1736.81 3450,1686.81 v2(3200,1436.81)
  L2 w25: v2@3065,1458.22 3086.41,1436.81 v2(3200,1436.81)
  other v2: 3065,1455
NetC4_1: C4.1 R2.1 Y1.2 | length 405.1
  L1 w8: C4.1 4662.99,3720.43 Y1.2 4685,3532.99 4685,3455 4708.8,3431.2 4708.8,3341.2 R2.1
NetD1_1: D1.1 R8.2 | length 162.3
  L1 w8: R8.2 D1.1
NetD2_1: D2.1 R6.2 | length 266.7
  L1 w8: R6.2@6549.53,2745 D2.1
NetD3_1: D3.1 R7.2 | length 265.9
  L1 w8: R7.2@6550.94,2911.34 6552.28,2910 D3.1
NetP1_3_5: P1_3.5
NetP1_3_6: P1_3.6
NetR4_1: R4.1 U1.44 | length 210.6
  L1 w8: U1.44 5083.16,3290 5123.16,3290 5182.29,3349.12 R4.1@5187.7,3349.12
nFault_X: 1_1.4 U1.25 | length 1907.4
  L1 w8: v2(4815,2590) 4825,2590 5730,1685 1_1.4 ; v2(4880,2660) 4990.65,2770.65 4990.65,2888.48 U1.25
  L2 w8: v2(4815,2590) 4880,2655 v2(4880,2660)
nFault_Y: 1_2.4 U1.26 | length 2127.4
  L1 w8: v2(4175,2640) 4175,1830 4318.19,1686.81 1_2.4 ; v2@4897.31,3015 v2(4895,3015) 4895,3011.97 U1.26
  L2 w8: v2(4175,2640) 4275,2740 4614.64,2740 4674.64,2800 4680.36,2800 4705,2824.64 4705,2825 v2(4895,3015)
nFault_Z: 1_3.4 U1.27 | length 3693.3
  L1 w8: 1_3.4 2728.19,1686.81 2595,1820 2595,2000 2795,2200 4005,2200 4100,2295 4100,2665 4530,3095 v2(4535,3095) ; v2(4850,3100) 4920,3030 4920,3014.81 U1.27
  L2 w8: v2(4535,3095) 4537.5,3097.5 4847.5,3097.5 v2(4850,3100)
NRST: C3.2 S1.2 U1.7 | length 1274
  L1 w8: S1.2 3753.35,3582.24 3793.03,3542.56 C3.2 ; C3.2@3795,3541.81 4448.19,3541.81 4730,3260 4758.32,3260 U1.7
OSC_IN: C6.1 U1.5 Y1.1 | length 812.8
  L1 w8: U1.5 4841.71,3233.32 4800,3275.03 4800,3315 4735,3380 4735,3425 4755,3445 4995,3445 5037.01,3487.01 Y1.1 5037.01,3734.57 C6.1
OSC_OUT: R2.2 U1.6 | length 113.9
  L1 w8: R2.2 4750,3296.16 U1.6
SWCLK: P3.3 U1.37 | length 538.7
  L1 w8: U1.37 5196.27,3208.23 5388.23,3208.23 P3.3
SWDIO: P3.2 U1.34 | length 840.6
  L1 w8: U1.34 5154.68,2975 5380,2975 5660,3255 P3.2 P3.2@5670,3380
USB_DM_L: U1.32 X1.2 | length 1589.6
  L1 w8: U1.32 5068.24,3006.79 5093.11,2981.93 5094.68,2981.93 5196.61,2880 5761,2880 6194.93,3313.93 6221.07,3313.93 6257.45,3350.31 6294.37,3387.24 6327.6,3387.24 6342.35,3372.48 6342.35,3365.85 6323.63,3347.13 X1.2
USB_DP_H: U1.33 X1.3 | length 1602.9
  L1 w8: U1.33 5081.13,3019.68 5105.99,2994.82 5105.99,2993.24 5203.24,2896 5754.37,2896 6188.31,3329.93 6214.44,3329.93 6250.82,3366.31 6287.74,3403.24 6334.23,3403.24 6358.35,3379.11 6358.35,3365.85 6377.08,3347.13 X1.3
USB_VBUS: D1.2 X1.1 | length 770.3
  L1 w8: X1.1 6310.98,3630.98 6400,3720 6775,3720 6808.75,3753.75 D1.2
VDD: 1_1.5 1_2.5 1_3.5 C1_1.2 C1_2.2 C1_3.2 C2_1.2 C2_2.2 C2_3.2 C16.2 C18.2 J3.1 U2.3
pads on no net: J1.4 J1.5 J2.4 J2.5 P1_1.P1 P1_1.P2 P1_2.P1 P1_2.P2 P1_3.P1 P1_3.P2 S1.3 S1.4 U1.3 U1.4 U1.10 U1.11 U1.20 U1.21 U1.22 U1.28 U1.31 U1.40 U1.41 U1.42 U1.43 U1.45 U1.46 U2.4 X1.P1 X1.P2

## Polygon pours and split planes (outlines as drawn)
+3V3 on L1 "L1-+3V3" (solid, pour order 18): 2430,2250 2430,4150 2435,4155 6970,4155 6970,2545 6960,2535 5550,2535 5550,2250
VDD on L1 "L1-VDD" (solid, pour order 14): 2440,2250 2440,1040 2446.81,1033.19 6970,1033.19 6970,2535 6930,2535 5550,2535 5550,2250
no net on L1 "L1-No Net 1" (solid, pour order 16): 6965,2540
no net on L1 "L1-No Net 2" (solid, pour order 8): 6300,2495
no net on L1 "L1-No Net" (solid, pour order 2): 4525,2045
GND on L2 "L2-GND" (solid, pour order 20): 2435,4155 2440,4150 2440,1030 6960,1030 6965,1035 6960,1040 6960,4155

## Other copper
L1:
  rectangle net GND: 6015,1575 6105,1905
  rectangle net GND: 4495,1665 4585,1820
  rectangle net GND: 6825,1390 6950,1575
  rectangle net GND: 2970,1576.81 3060,1906.81
  rectangle net GND: 3780,1391.81 3905,1576.81
  rectangle net GND: 4495,1576.81 4585,1906.81
  rectangle net GND: 5305,1391.81 5430,1576.81
  rectangle net GND: 3780,1390 3905,1575
  rectangle net GND: 5305,1390 5430,1575

## Text inside footprints (layer, text, board x,y; h text height)
C1_1: Mechanical 7 "0.102in/2.591mm" at 6873.25,1755 h25 r180
C1_2: Mechanical 7 "0.291in/7.391mm" at 5258.75,1231.81 h25 r180; Mechanical 7 "0.032in/0.813mm" at 4871.5,1494.31 h25 r180
C1_3: Mechanical 7 "0.032in/0.813mm" at 3346.5,1494.31 h25 r180; Mechanical 7 "0.291in/7.391mm" at 3733.75,1231.81 h25 r180; Mechanical 7 "0.102in/2.591mm" at 3828.25,1756.81 h25 r180
D1: Mechanical 7 "0.032in/0.813mm" at 6411.5,3777.5 h25; Mechanical 7 "0.063in/1.6mm" at 6703.75,4026 h25
D2: Mechanical 7 "0.032in/0.813mm" at 6466.5,2732.5 h25
D3: Mechanical 7 "0.032in/0.813mm" at 6466.5,2897.5 h25